# Altium PCB LANA_TNY_01.PcbDoc
Units mil, origin at the board's own origin, x right, y up, seen from the top; angles counter-clockwise.
Board outline 700 x 800 mil, 2 copper layers (Top Layer, Bottom Layer), stack 32.328 mil thick; 32 components, 32 nets, 149 pads, 33 vias.
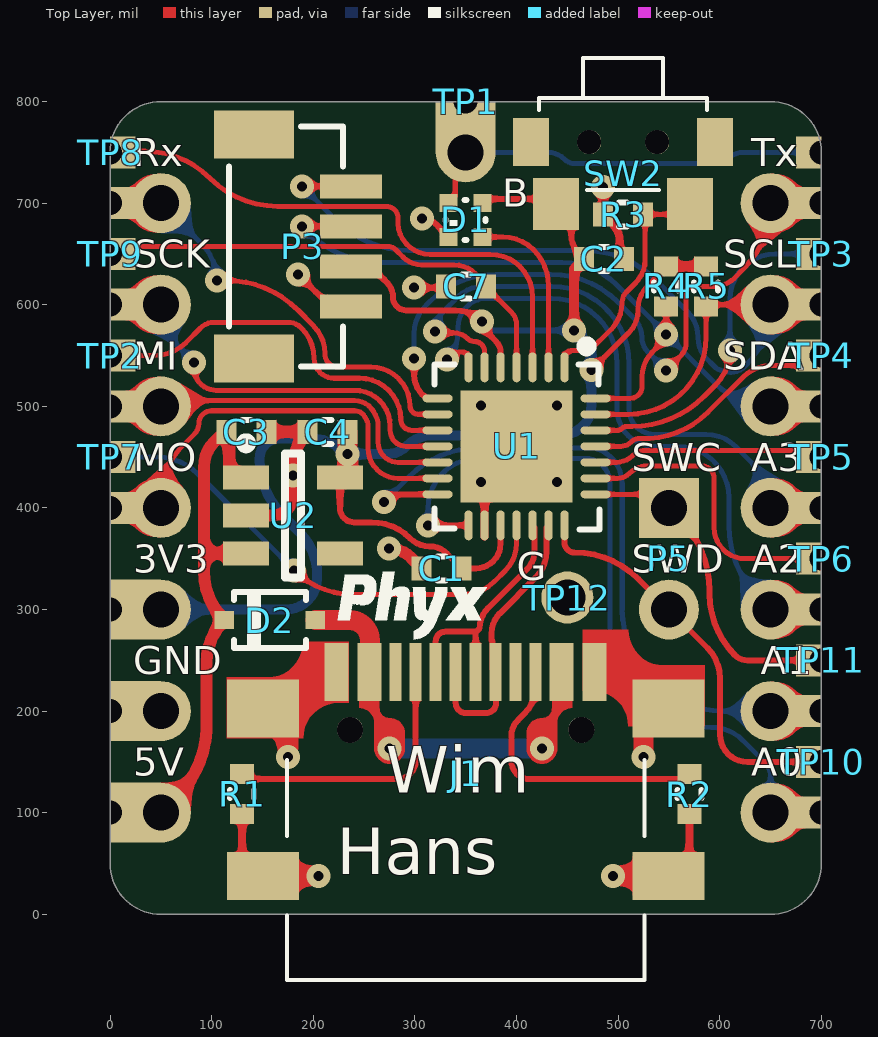
[diagram p0: Top Layer view]
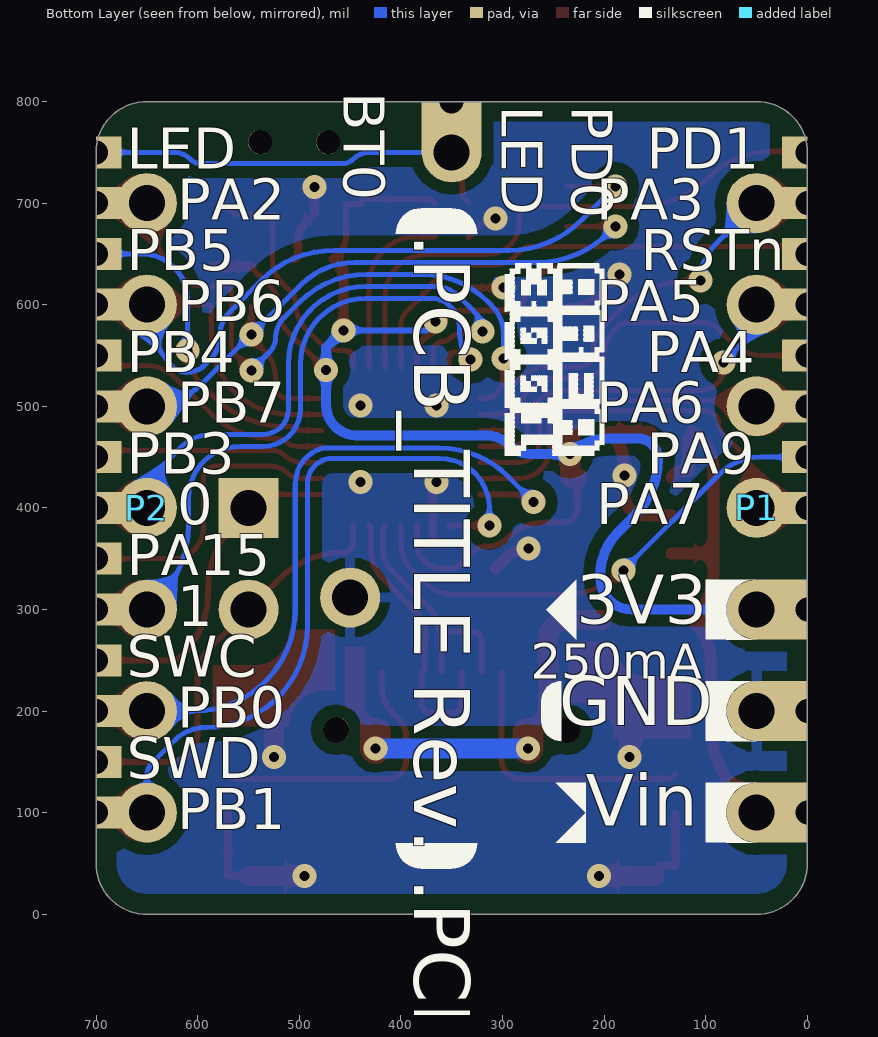
[diagram p1: Bottom Layer view, seen from below]

## Layer stack, top to bottom
Top Solder: solder mask 0.4, Solder Resist, Dk 3.5
Top Layer: signal copper 1.4
Dielectric1: core 29.5276, FR-4, Dk 4.8
Bottom Layer: signal copper 1.4
Bottom Solder: solder mask 0.4, Solder Resist, Dk 3.5

## Board outline
0,50 0,750 cw(c50,750) 50,800 650,800 cw(c650,750) 700,750 700,50 cw(c650,50) 650,0 50,0 cw(c50,50)

## Design rules (kind name [scope] priority, off if disabled: settings)
BoardOutlineClearance [NOT OnLayer('Top Overlay') AND NOT OnLayer('Bottom Overlay') AND NOT IsText] p1: gap=19.68 ignorepadtopadclearanceinfootprint=FALSE except(0: Arc-SplitContinuation Track-SplitContinuation SMDPad-SplitContinuation THPad-SplitContinuation Via-SplitContinuation Fill-SplitContinuation Poly-SplitContinuation Region-SplitContinuation Text-SplitContinuation; 9.84: Track-OutlineEdge SMDPad-OutlineEdge THPad-OutlineEdge)
Clearance [All] p1: gap=5.91 ignorepadtopadclearanceinfootprint=FALSE except(0: Arc-Hole Track-Hole SMDPad-Hole THPad-Hole Via-Hole Fill-Hole Poly-Hole Region-Hole Text-Hole; 5: Arc-Arc Arc-Track Arc-SMDPad Arc-THPad Arc-Via Arc-Region Track-Track Track-SMDPad Track-THPad Track-Via Track-Region SMDPad-SMDPad; 9.84: SMDPad-Poly Poly-Region; 11.81: Arc-Poly Track-Poly THPad-Poly Via-Poly Fill-Poly; 19.68: Poly-Poly)
ComponentClearance ComponentClearance_J2/D6/D10 [InComponent('J2') vs InComponent('D6') OR InComponent('D10')] p1: gap=10 collisioncheckmode=3 verticalgap=0 showdistances=FALSE
ComponentClearance [All] p2: gap=10 collisioncheckmode=3 verticalgap=10 showdistances=FALSE
DiffPairsRouting [All] p1: maxlimit=5.91 minlimit=5.91 mostfreqgap=5.91 toplayer_minwidth=5.91 toplayer_maxwidth=5.91 toplayer_prefwidth=5.91 bottomlayer_minwidth=5.91 bottomlayer_maxwidth=5.91 bottomlayer_prefwidth=5.91 maxuncoupledlength=500
HoleSize [All] p1: absolutevalues=TRUE maxlimit=393.7 minlimit=1 maxpercent=80.000 minpercent=20.000
PolygonConnect PolygonConnect_VIA [IsVia] p1: connectstyle=Direct reliefconductorwidth=10 reliefentries=4 polygonreliefangle="90 Angle" airgapwidth=10
PolygonConnect [All] p2: connectstyle=Relief reliefconductorwidth=10 reliefentries=4 polygonreliefangle="90 Angle" airgapwidth=10
RoutingVias [All] p1: holewidth=11.81 width=27.56 viastyle="Through Hole" minholewidth=11.81 minwidth=7.87 maxholewidth=23.62 maxwidth=47.24
SilkToSolderMaskClearance SilkscreenOverComponentPads [IsPad] p1: minsilkscreentomaskgap=10 clearancetoexposedcopper=TRUE
SolderMaskExpansion [All] p1: expansion=1.97 istentingtop=FALSE
Width [All] p1: maxlimit=196.85 minlimit=5 preferedwidth=9.84
26 further rules are at their usual default settings.

## Classes and differential pairs
net class 90r: USB.D_n USB.D_p
net class POWER: GND VSYS VUSB
differential pair USB.D: +USB.D_p -USB.D_n

## Components (designator, comment, footprint, x,y, rotation, side; value= is the part's Value field where it differs from the comment)
C1 "CAP_CERAMIC" C0402 326.38,340.57 r180 top value="100nF 16V"
C2 "CAP_CERAMIC" C0402 486,645 r0 top value="100nF 16V"
C3 "CAP_CERAMIC" C0402 134,474.88 r0 top value="1uF 10V"
C4 "CAP_CERAMIC" C0402 214,474.88 r180 top value="1uF 10V"
C7 "CAP_CERAMIC" C0402 350.39,618.11 r180 top value="100nF 16V"
D1 "WS2812 based digital RGB LED 1010 package" LED_1010_WS2812B 350,683.38 r0 top value=XL-1010RGBC-WS2812B
D2 "CUS10S30 Schottky Power Rectifier, 1A, 30V" SOD-323_AC 157.13,289.57 r180 top value=CUS10S30,H3F
J1 "USB 2.0 C Reversible Receptacle Horizontal full SMD" XUNPU-TYPEC-304S-ACP16 350,138.19 r0 top value=TYPEC-304S-ACP16
P1 "Header 7" HDR1X7 50,100 r90 bottom
P2 "Header 7" HDR1X7 650,100 r90 bottom
P3 "Header 1.0mm Shrouded 4" WE_665304124022 237.2,598.43 r270 top value=665304124022
P5 "Header 2" HDR1X2 550,400 r270 top
R1 "RESISTOR" R0402 130,118.19 r90 top value=5K1
R2 "RESISTOR" R0402 570,118.19 r90 top value=5K1
R3 "RESISTOR" R0402 505,688.98 r180 top value=5K1
R4 "RESISTOR" R0402 547.24,618.11 r270 top value=5K1
R5 "RESISTOR" R0402 586.61,618.11 r270 top value=5K1
SW2 "TS24CA RA Tactile Switch 12V 50mA" SHOU_HAN_TS24CA 505,760 r0 top value=TS24CA
TP1 "TEST_PAD" TP_0.4mm 350,800 r0 top value="NO BOM"
TP2 "TEST_PAD" TP_0.4mm 0,550 r90 top value="NO BOM"
TP3 "TEST_PAD" TP_0.4mm 700,650 r90 top value="NO BOM"
TP4 "TEST_PAD" TP_0.4mm 700,550 r90 top value="NO BOM"
TP5 "TEST_PAD" TP_0.4mm 700,450 r90 top value="NO BOM"
TP6 "TEST_PAD" TP_0.4mm 700,350 r90 top value="NO BOM"
TP7 "TEST_PAD" TP_0.4mm 0,450 r90 top value="NO BOM"
TP8 "TEST_PAD" TP_0.4mm 0,750 r90 top value="NO BOM"
TP9 "TEST_PAD" TP_0.4mm 0,650 r90 top value="NO BOM"
TP10 "TEST_PAD" TP_0.4mm 700,150 r90 top value="NO BOM"
TP11 "TEST_PAD" TP_0.4mm 700,250 r90 top value="NO BOM"
TP12 "TEST_PAD" TP_1.2mm_0.6mm 450,311.81 r0 top value="NO BOM"
U1 "WCH CH32V203G8U6 QFN28 RISC-V 32-bit MCU, 64KB Flash, 20KB RAM, USB, CAN" QFN_28_4.0x4.0_P0.4 400,460.63 r270 top value=CH32V203G8U6
U2 "3V3 LDO 300mA 150mV" SOT23-5 180,392.76 r0 top value=RT9078-33GJ5

## Footprints (in the part's own frame and the unit in brackets; to place one, negate y for a bottom-side part, rotate by r counter-clockwise, add the part's x,y. Pads: shape width x height; smd on the part's side, far side on the other; paste and mask are expansions set on the pad)
C0402 [mm]
  rect 0.5x0.6 smd: 1(-0.5,0) 2(0.5,0)
  silkscreen extent -0.1,-0.3 0.1,0.3, body extent -0.5,-0.25 0.5,0.25, height 0.5
HDR1X2 [mm] "Connector; Header; 2 Position"
  rect 1.5x1.5 hole 0.9: 1(0,0)
  round 1.5 hole 0.9: 2(2.54,0)
  body extent -1.17,-1.25 3.91,1.25, height 8.2
HDR1X7 [mm] "Connector; Header; 7 Position"
  round 1.5 hole 0.9: 1(0,0) 2(2.54,0) 3(5.08,0) 4(7.62,0) 5(10.16,0) 6(12.7,0) 7(15.24,0)
  body extent -1.27,-1.14 16.51,1.14, height 8.13
LED_1010_WS2812B [mm] "1010 WS2812B based RGB LED"
  rect 0.45x0.45 smd: 1(-0.425,0.425) 2(0.425,0.425) 3(-0.425,-0.425) 4(0.425,-0.425)
  silkscreen extent -0.5,-0.5 0.5,0.5, body extent -0.5,-0.5 0.5,0.5, height 0.8
QFN_28_4.0x4.0_P0.4 [mm]
  oval 0.75x0.2 smd: 1(-1.975,1.2) 2(-1.975,0.8) 3(-1.975,0.4) 4(-1.975,0) 5(-1.975,-0.4) 6(-1.975,-0.8) 7(-1.975,-1.2) 15(1.975,-1.2) 16(1.975,-0.8) 17(1.975,-0.4) 18(1.975,0) 19(1.975,0.4) 20(1.975,0.8) 21(1.975,1.2)
  oval 0.2x0.75 smd: 8(-1.2,-1.975) 9(-0.8,-1.975) 10(-0.4,-1.975) 11(0,-1.975) 12(0.4,-1.975) 13(0.8,-1.975) 14(1.2,-1.975) 22(1.2,1.975) 23(0.8,1.975) 24(0.4,1.975) 25(0,1.975) 26(-0.4,1.975) 27(-0.8,1.975) 28(-1.2,1.975)
  rect 2.8x2.8 smd: 29(0,0)
  silkscreen extent -2.62,-2.05 2.07,2.07, body extent -2.07,-2.07 2.07,2.07, height 0.8
R0402 [mm]
  rect 0.5x0.6 smd: 1(-0.5,0) 2(0.5,0)
  silkscreen extent -0.1,-0.3 0.1,0.3, body extent -0.5,-0.25 0.5,0.25, height 0.35
SHOU_HAN_TS24CA [mm] "TS24CA tactile switch"
  rect 0.9x1.2 smd: 0(-2.3,0) 0(2.3,0)
  round 0.6 hole 0.6 unplated: 0(-0.85,0) 0(0.85,0)
  rect 1.15x1.3 smd: 1(-1.675,-1.55) 2(1.675,-1.55)
  silkscreen extent -2.1,-1.2 2.1,2.1, body extent -2.1,-1.2 2.1,2.1, height 1.8
SOD-323_AC [mm] "SOD-323"
  rect 0.49x0.45 smd: A(-1.14,0) C(1.14,0)
  silkscreen extent -0.9,-0.7 0.9,0.7, body extent -1.3,-0.68 1.3,0.68, height 1.1
SOT23-5 [mm] "SOT23, 5-Leads, Body 3,1x3,2mm (max), Pitch 0,95mm, IPC Medium Density"
  rect 1.15x0.6 smd: 1(-1.175,0.95) 2(-1.175,0) 3(-1.175,-0.95) 4(1.175,-0.95) 5(1.175,0.95)
  silkscreen extent -1.3,-1.55 0.2,1.92, body extent -1.4,-1.45 1.4,1.45, height 1.45
TP_0.4mm [mm] "0.4mm pad"
  round 0.4 smd mask+0.05: 1(0,0)
TP_1.2mm_0.6mm [mm] "1.2mm pad, 0.6mm hole"
  round 1.3 / inner round 1.5 / far side round 1.5 hole 0.9 mask+0.05: 1(0,0)
WE_665304124022 [mm]
  rect 0.6x1.55 smd: 1(0,0) 2(-1,0) 3(-2,0) 4(-3,0)
  rect 1.2x2 smd: Z1(-4.3,-2.425) Z2(1.3,-2.425)
  silkscreen extent -4.5,-3.05 1.5,-0.2, body extent -4.5,-3.1 1.5,0.5, height 4.35
XUNPU-TYPEC-304S-ACP16 [mm] "USB C Connector SMD"
  round 0.65 hole 0.65 unplated: 0(-2.89,1.102) 0(2.89,1.102)
  rect 0.3x1.45 smd: A1(-3.375,2.547) A4(-2.55,2.548) A5(-1.25,2.548) A6(-0.25,2.547) A7(0.25,2.547) A8(1.25,2.548) A9(2.55,2.547) A12(3.375,2.548) B1(3.075,2.547) B4(2.25,2.548) B5(1.75,2.548) B6(0.75,2.547) B7(-0.75,2.547) B8(-1.75,2.548) B9(-2.25,2.547) B12(-3.075,2.548)
  rect 1.8x1.45 smd: MH1(-5.07,1.632) MH4(5.07,1.632)
  rect 1.8x1.2 smd: MH2(-5.07,-2.548) MH3(5.07,-2.548)
  silkscreen extent -4.47,-5.15 4.47,0.35, body extent -4.5,-5.15 4.44,2.75, height 3.26

## Part data
C1 C2 C7: library part "CAP # 100nF 16V 0402", "Capacitor Ceramic", Supplier Part Number 1=1758896, Supplier 1=Farnell, Supplier 3=Generic, Supplier Part Number 3="100nF 16V 0402 X7R"
C3 C4: library part "CAP # 1uF 10V 0402", "Capacitor Ceramic", Supplier Part Number 1=C380293, Supplier 1=LCSC, Supplier 3=Generic, Supplier Part Number 3="1uF 10V 0402 X5R"
D1: library part "LED # RGB XL-1010RGBC-WS2812B", "=Description", Supplier Part Number 1=C5349953, Supplier 1=LCSC
D2: library part "Schottky # CUS10S30", "=Description", Supplier Part Number 1=C146335, Supplier 1=LCSC
J1: library part "USB # C 2.0 RCPT TYPEC-304S-ACP16", Supplier Part Number 1=C720630, Supplier 1=LCSC
P1 P2: library part "Pin Header 2.54mm 7way"
P3: library part "HDR # SHR 1.0mm 4way - 665304124022", Supplier Part Number 1=665304124022, Supplier 1=Wurth, Supplier 2=Mouser, Supplier Part Number 2=710-665304124022
P5: library part "Pin Header 2.54mm 2way", Supplier Part Number 1=C492401, Supplier 1=LCSC, Supplier 2=LCSC, Supplier Part Number 2=C541856
R1 R2 R3 R4 R5: library part "RES # 5K1 0402", Supplier Part Number 1=C274895, Supplier 1=LCSC, Supplier 3=Generic, Supplier Part Number 3="5K1 1% 0402"
SW2: library part "SW # TACT RA TS24CA", Supplier Part Number 1=C393942, Supplier 1=LCSC
TP1 TP2 TP3 TP4 TP5 TP6 TP7 TP8 TP9 TP10 TP11: library part "TP # 0.4mm", Supplier Part Number 1="FOOTPRINT ONLY", Supplier 1=XXX
TP12: library part "TP 1.2mm", Supplier Part Number 1="FOOTPRINT ONLY", Supplier 1=XXX
U1: library part "RISCV # CH32V203G8U6", Supplier Part Number 1=C5187530, Supplier 1=LCSC
U2: library part "LDO # 3V3 300mA RT9078-33GJ5", "=Designator", Supplier Part Number 1=C110427, Supplier 1=LCSC

## Free pads (board coordinates)
  rect 50x59.06 hole 23.62 copper offset 25,0: 0(0,100) 0(0,200) 0(0,300)
  rect 25x31.5 hole 23.62 copper offset 12.5,0: 0(0,400) 0(0,500) 0(0,600) 0(0,700)
  rect 25x31.5 hole 23.62 copper offset 12.5,0 mask+1.97: 0(0,450) 0(0,550) 0(0,650) 0(0,750)
  rect 59.06x50 hole 23.62 copper offset 0,-25: 0(350,800)
  rect 25x31.5 hole 23.62 copper offset -12.5,0: 0(700,100) 0(700,200) 0(700,300) 0(700,400) 0(700,500) 0(700,600) 0(700,700)
  rect 25x31.5 hole 23.62 copper offset -12.5,0 mask+1.97: 0(700,150) 0(700,250) 0(700,350) 0(700,450) 0(700,550) 0(700,650) 0(700,750)
  round 59.06 hole 35.43: 1(350,750)

## Via types
v1: diameter 23.62, hole 9.84, Top Layer to Bottom Layer, tented both sides, 33 vias

## Nets (pads, with @x,y where several pads share a name; then routed paths per layer and width w, separated by ;. In a path a pad name is that pad's centre, name@x,y a point inside that pad or via, vN(x,y) a via of type N, cw(c..) or ccw(c..) an arc to the next point about the centre after c; other vN are vias at no path point)
+3V3: C1.1 C2.1 C4.1 D1.2 P1.3 P3.2 pad.0@0,300 R4.1 R5.1 SW2.1 U1.5 U1.17 U2.5 | length 1742
  Top Layer w5: v1(473.71,535.69) 510.61,572.58 ccw(c488.71,594.49) 519.68,594.49 519.68,596.49 cw(c550.06,596.49) 528.58,617.97 547.24,636.64 R4.1
  Top Layer w5.91: U2.5 226.26,399.72 ccw(c240.16,399.72) 240.16,385.83 257.26,385.83 cw(c257.26,332.06) 295.28,370.08 ccw(c314.29,389.09) 314.29,362.2 cw(c314.29,337.72) 331.6,355.03 C1.1 360.02,340.57 ccw(c360.02,364.8) 384.25,364.8 U1.17 ; P3.2 cw(c237.2,591.24) 270.12,624.16 272.42,621.86 cw(c257.9,607.34) 278.44,607.34 ccw(c291.29,607.34) 291.29,594.49 339.79,594.49 cw(c339.79,557.42) v1(366,583.63) ccw(c380.28,583.63) 370.17,573.54 379.96,563.76 cw(c369.58,553.39) 384.25,553.39 U1.5 ; D1.2 370.67,704.05 439.06,704.05 SW2.1 454,698.98 454,668 ccw(c479.8,668) 461.56,649.76 C2.1 C2.1@467,644.31
  Top Layer w9.84: v1(456.69,574.8) 456.69,635.38 C2.1 ; R4.1 R5.1
  Top Layer w19.68: U2.5 233.82,430.16 v1(233.82,452.99) C4.1@233.82,474.88
  Bottom Layer w5.91: v1(366,583.63) 374.83,574.8 v1(456.69,574.8)
  Bottom Layer w9.84: P1.3 173.25,300 ccw(c173.25,330.21) 203.46,330.21 203.46,340.61 ccw(c143.33,333.47) 186.15,376.29 170.17,392.26 cw(c226.1,448.2) 147,448.2 cw(c167.31,448.2) 167.31,468.5 196.37,468.5 cw(c196.37,415.55) v1(233.82,452.99) ; v1(233.82,452.99) 272.9,452.99 ccw(c272.9,479.06) 291.34,460.63 cw(c317.58,434.39) 317.58,471.5 443.94,471.5 ccw(c443.94,501.27) 473.71,501.27 v1(473.71,535.69) 473.71,545.52 473.71,557.78 v1(456.69,574.8)
BOOT0: R3.1 SW2.2 U1.1 | length 243.1
  Top Layer w5: U1.1 447.24,547.57 cw(c454.65,547.57) 454.65,554.97 459.41,554.97 ccw(c459.41,586.08) 464.61,555.41 ccw(c459.41,586.08) 481.41,564.08 492.8,575.48 ccw(c465.92,602.36) 503.94,602.36 cw(c518.43,602.36) 508.17,612.6 517.5,621.93 ccw(c495.47,643.97) 519.93,624.66 ccw(c495.47,643.97) 526.63,643.97 526.63,687.03 ccw(c524.68,687.03) R3.1 560.94,688.98 ccw(c560.94,698.98) SW2.2
GND: C1.2 C2.2 C3.2 C4.2 C7.2 D1.3 J1.A1 J1.A12 J1.B1 J1.B12 J1.MH1 J1.MH2 J1.MH3 J1.MH4 P1.2 P3.1 pad.0@0,200 R1.1 R2.1 R3.2 TP12.1 U1.16 U1.29 U2.2 | length 865
  Top Layer w5.91: v1(185.04,629.92) 201.92,613.04 ccw(c237.2,648.33) P3.1 ; v1(299.09,616.71) 329.31,616.71 ccw(c329.31,618.11) C7.2 ; v1(307.09,685.04) cw(c307.09,666.24) 320.38,679.53 D1.3
  Top Layer w7.87: R1.1 130,48.19 J1.MH2@145,48.19 ; v1(365,425.63) cw(c356.54,417.17) 368.5,417.17 U1.16@368.5,372.05 ; v1(485.32,715.98) R3.2 494.6,679.69 cw(c478.14,663.23) 501.42,663.23 501.42,649.26 ccw(c505.68,649.26) C2.2 ; J1.MH3@550,38.19 570,38.19 R2.1
  Top Layer w11.81: U2.2 160.31,392.76 ccw(c160.31,412.44) 180,412.44 v1(180,432.13) 180,440.32 cw(c228.87,440.32) C4.2 C3.2 ; v1(274.62,360.02) cw(c274.62,329.58) 296.15,351.11 C1.2
  Top Layer w19.68: J1.MH2 J1.MH2@174.7,37.89 ; J1.MH1 175,202.46 v1(175,154.85) ; J1.MH2@175,38.19 J1.MH2@174.7,37.89 ; v1(205,37.89) J1.MH2@174.7,37.89 ; v1(495,37.89) J1.MH3 ; v1(525,154.85) 525,202.46 J1.MH4
  other v1: 440,425.63 365,500.63 440,500.63
LED.DOUT: D1.1 pad.0@350,800 pad.0@700,750 pad.1 TP1.1 | length 400.6
  Top Layer w5: D1.1 339.66,706.5 339.66,734.1 350,744.44 pad.1
  Bottom Layer w5: pad.1 430.55,750 cw(c430.55,726.1) 447.45,743 ccw(c457.17,752.72) 457.17,738.97 597.28,738.97 ccw(c597.28,752.72) 607,743 cw(c623.9,726.1) 623.9,750 pad.0@687.87,750
NetJ1_A5: J1.A5 R1.2 | length 270.2
  Top Layer w5.91: R1.2 134.68,133.19 282.62,133.19 ccw(c282.62,151.35) 300.79,151.35 J1.A5
NetJ1_B5: J1.B5 R2.2 | length 282.1
  Top Layer w5.91: J1.B5 418.9,224.32 cw(c380.9,224.32) 407.77,197.45 401.22,190.91 ccw(c416.24,175.89) 395,175.89 395,150.61 ccw(c412.42,150.61) 412.42,133.19 565.32,133.19 R2.2
PA0: P2.4 pad.0@700,400 U1.6 | length 568.5
  Top Layer w5: v1(319.79,573.55) 321.09,572.24 338.21,572.24 cw(c338.21,552.5) 352.17,566.46 ccw(c359,573.29) 359,563.63 cw(c359,554.13) 368.5,554.13 U1.6
  Bottom Layer w5: v1(319.79,573.55) cw(c347.61,573.55) 327.93,593.22 342.61,607.89 cw(c367.28,583.23) 367.28,618.11 434.42,618.11 cw(c434.42,541.73) 510.8,541.73 510.8,497.07 ccw(c535.43,497.07) 535.43,472.44 586.47,472.44 cw(c586.47,431.18) 615.62,460.38 ; 615.64,460.36 631.62,444.38 cw(c587.23,400) P2.4
PA1: P2.3 pad.0@700,300 U1.7 | length 607.6
  Top Layer w5: v1(331.37,546.13) 333.51,548.27 cw(c346.45,535.34) 346.45,553.63 cw(c346.45,547.32) 352.76,547.32 U1.7
  Bottom Layer w5: v1@331.39,546.15 ccw(c304.46,573.04) 342.52,573.04 342.52,578.08 cw(c370.74,578.08) 346.54,592.59 cw(c370.74,578.08) 348.12,594.96 353.86,600.7 cw(c370.74,578.08) 370.74,606.3 434.42,606.3 cw(c434.42,541.73) 498.99,541.73 498.99,497.07 ccw(c535.43,497.07) 535.43,460.63 558.37,460.63 cw(c558.37,410) 609,410 609,382.42 ccw(c709,382.42) 638.29,311.71 P2.3
PA2: P2.7 pad.0@700,700 U1.8 | length 619.9
  Top Layer w5: v1(547.24,535.43) 561.69,549.88 ccw(c549.06,562.52) 566.93,562.52 566.93,611.14 cw(c573.9,611.14) 573.9,618.11 594.49,618.11 ccw(c594.49,646.62) 614.65,626.46 623,634.81 ccw(c557.8,700) P2.7
  Top Layer w5.91: v1(299.21,547.24) 299.21,530.82 ccw(c326.1,530.82) 307.09,511.81 ccw(c316.59,521.32) 316.59,507.87 U1.8
  Bottom Layer w5: v1(299.21,547.24) 299.21,571.47 cw(c338.44,571.47) 310.7,599.21 314.37,602.88 cw(c379.66,537.59) 379.66,629.92 433.47,629.92 cw(c433.47,535.83) 500,602.36 515.39,586.97 cw(c496.28,567.86) 523.31,567.86 ccw(c543.8,567.86) 523.59,564.45 ccw(c543.8,567.86) 529.31,553.37 ; 529.31,553.37 v1(547.24,535.43)
PA3: P1.7 pad.0@0,700 U1.9 | length 381.5
  Top Layer w5: v1(105,624) 114.11,624 cw(c114.11,524) 184.82,594.71 199.74,579.79 cw(c171.72,551.78) 211.34,551.78 211.34,551.6 ccw(c224.27,551.6) 224.27,538.67 256.6,538.67 cw(c256.6,500) 295.28,500 ccw(c303.15,500) 303.15,492.13 U1.9
  Bottom Layer w5: P1.7 90.15,659.85 cw(c54.3,624) v1(105,624)
PA4: pad.0@0,550 TP2.1 U1.10 | length 380.7
  Top Layer w5: pad.0@15,550 43.44,550 ccw(c43.44,594.36) 74.79,562.98 88.92,577.11 cw(c102.36,563.67) 102.36,582.68 174.49,582.68 cw(c174.49,562.85) 185.61,579.27 cw(c174.49,562.85) 188.52,576.87 ; 188.54,576.85 cw(c158.89,547.24) 200.79,547.24 ccw(c220.38,547.24) 220.38,527.65 245.53,527.65 cw(c245.53,487.12) 286.06,487.12 ccw(c296.8,487.12) 296.8,476.38 U1.10
PA5: P1.6 pad.0@0,600 U1.11 | length 359
  Top Layer w5: v1(82.68,543.31) 82.68,537.29 ccw(c104.22,537.29) 98.98,516.39 ccw(c104.22,537.29) 104.22,515.75 240.61,515.75 cw(c240.61,480.77) 275.59,480.77 275.59,476.38 ccw(c291.34,476.38) 291.34,460.63 U1.11
  Bottom Layer w5: P1.6 ccw(c107.98,600) 66.98,559 v1(82.68,543.31)
PA6: P1.5 pad.0@0,500 U1.12 | length 315.5
  Top Layer w5: P1.5 cw(c63.54,486.46) 63.54,505.61 240.61,505.61 cw(c240.61,484.25) 256.86,498.11 cw(c240.61,484.25) 259.01,495.1 cw(c238.49,480.31) 263.78,480.31 263.78,464.57 ccw(c283.46,464.57) 283.46,444.88 U1.12
PA7: P1.4 pad.0@0,400 U1.13 | length 384.4
  Top Layer w5: P1.4 50,410.25 cw(c121.24,410.25) 70.87,460.63 83.17,472.94 ccw(c73.25,482.86) 87.29,482.86 cw(c100.03,482.86) 100.03,495.61 240.61,495.61 cw(c240.61,484.25) 250.36,490.07 ccw(c259.01,495.1) 250.43,489.96 ccw(c259.01,495.1) 250.93,489.2 cw(c238.49,480.31) 253.78,480.31 253.78,458.82 ccw(c283.46,458.82) 283.46,429.13 303.3,429.13 U1.13
PA9: pad.0@0,450 TP7.1 U1.18 | length 479.3
  Top Layer w5: v1(181.1,338.58) ccw(c238.13,395.61) 238.13,314.96 348.03,314.96 ccw(c348.03,357.28) 377.94,327.35 389.05,338.45 ccw(c362.6,364.89) 400,364.89 U1.18
  Bottom Layer w5: pad.0@15,450 46.04,450 cw(c46.04,392.93) 86.4,433.28 v1(181.1,338.58)
PA15: pad.0@700,350 TP6.1 U1.23 | length 283.4
  Top Layer w5: U1.23 499.46,429.13 ccw(c499.46,445.56) 511.08,433.95 cw(c528.5,416.52) 522.94,440.53 cw(c528.5,416.52) 528.5,441.16 582.46,441.16 cw(c582.46,429.13) 594.49,429.13 594.49,380.51 ccw(c625,380.51) 625,350 pad.0@685,350
PB0: P2.2 pad.0@700,200 U1.14 | length 654.9
  Top Layer w5.91: v1(269.35,405.83) cw(c287.59,387.59) 287.59,413.39 U1.14
  Bottom Layer w5: v1(269.35,405.83) 294.27,430.75 cw(c362.2,362.81) 362.2,458.89 476.34,458.89 cw(c468.22,424.04) 504,424.04 504,300 ccw(c604,300) 604,200 P2.2
PB1: P2.1 pad.0@700,100 U1.15 | length 690.7
  Top Layer w5.91: v1@313.24,382.87 U1.15
  Bottom Layer w5: v1(313,382.63) 313,399.61 cw(c362.2,399.61) 362.2,448.82 467.22,448.82 cw(c467.22,424.04) 492,424.04 492,284 ccw(c592,284) 592,184 cw(c592,140.54) 603.81,182.36 cw(c592,140.54) 622.73,171.27 644.34,149.66 cw(c630.69,136) 650,136 P2.1
PB3: pad.0@700,450 TP5.1 U1.24 | length 209.9
  Top Layer w5: U1.24 498.1,444.88 ccw(c498.1,467.97) 514.42,451.64 cw(c526.61,439.45) 524.47,456.56 cw(c526.61,439.45) 526.61,456.69 684.21,456.69 pad.0@684.45,456.46
PB4: pad.0@700,550 TP4.1 U1.25 | length 238.6
  Top Layer w5: U1.25 502.85,460.63 ccw(c502.85,474.07) 512.36,464.57 cw(c521.86,455.06) 521.86,468.5 ccw(c526.29,556.08) 588.3,494.08 623.06,528.84 cw(c650,501.91) 650,540 680,540 pad.0@680,550
PB5: pad.0@700,650 TP3.1 U1.26 | length 325.4
  Top Layer w5: U1.26 499.12,476.38 ccw(c499.12,483.1) 503.86,478.34 cw(c508.63,473.57) 508.63,480.31 513.7,480.31 ccw(c513.7,580.31) 584.41,509.6 596.32,521.51 ccw(c562.71,555.12) v1(610.24,555.12)
  Bottom Layer w5: v1(610.24,555.12) 610,555.35 610,605 cw(c655,605) 655,650 685,650 pad.0@685,645
PB6: P2.6 P3.4 pad.0@700,600 R5.2 U1.27 | length 878.8
  Top Layer w5: v1(188.98,716.54) P3.4 ; U1.27 510.29,492.13 ccw(c510.29,568.45) 586.61,568.45 R5.2 cw(c590.42,594.62) 590.42,600 P2.6
  Bottom Layer w5: v1(188.98,716.54) 222.39,683.13 ccw(c293.8,754.54) 293.8,653.54 466.04,653.54 cw(c466.04,552.54) 537.46,623.96 568.23,593.19 cw(c542.84,567.81) 578.74,567.81 ccw(c610.6,567.81) 584.7,549.25 595.78,538.17 ccw(c610.84,559.93) 610.84,533.47 ccw(c610.84,553.28) 624.85,539.27 ccw(c564.12,600) P2.6
PB7: P2.5 P3.3 pad.0@700,500 R4.2 U1.28 | length 711.4
  Top Layer w5: v1(188.98,677.17) P3.3 ; U1.28 511.81,507.87 ccw(c511.81,519.68) 523.62,519.68 523.62,529.2 cw(c557.68,529.2) 533.6,553.28 547.24,566.93 v1(547.24,570.87) R4.2
  Bottom Layer w5: v1(188.98,677.17) 194.83,671.31 ccw(c266.25,742.73) 266.25,641.73 444.88,641.73 cw(c444.88,565.69) 498.65,619.46 v1(547.24,570.87) 595.56,522.55 ccw(c650,576.99) P2.5
PD0: D1.4 U1.2 | length 173
  Top Layer w5: D1.4 386.51,666.65 cw(c386.51,623.9) 416.73,654.14 cw(c381.12,618.5) 431.5,618.5 U1.2
PD1: pad.0@0,750 TP8.1 U1.3 | length 537.8
  Top Layer w5: pad.0@14.64,751.03 34.17,751.03 cw(c34.17,660.15) 98.43,724.41 ccw(c164.96,790.94) 164.96,696.85 271.65,696.85 cw(c271.65,685.04) 283.46,685.04 ccw(c314.78,681.16) 314.78,649.61 374.02,649.61 cw(c374.02,607.87) 415.75,607.87 U1.3
RSTn: C7.1 pad.0@0,650 TP9.1 U1.4 | length 458.5
  Top Layer w5: pad.0@17.52,657.12 17.88,657.48 273.11,657.48 cw(c273.11,646.4) 280.94,654.24 288.47,646.7 ccw(c306.65,664.89) 306.65,639.17 338.47,639.17 cw(c338.47,608.95) 359.84,630.32 C7.1@368.69,621.47 ; C7.1@368.7,621.45 cw(c365.33,618.11) C7.1 370.08,617.56 394.93,592.7 cw(c382.7,580.47) 400,580.47 U1.4
SWCLK: P5.1 pad.0@700,250 TP11.1 U1.22 | length 309.8
  Top Layer w5: U1.22 550,413.39 P5.1
  Top Layer w5.91: P5.1@560.71,389.29 cw(c490,318.58) 590,318.58 590,315.36 ccw(c675.36,315.36) 615,255 ccw(c627.07,267.07) 627.07,250 pad.0@689,250
SWDIO: P5.2 pad.0@700,150 TP10.1 U1.21 | length 391
  Top Layer w5.91: U1.21 447.24,365.64 ccw(c456.69,365.64) 456.69,356.19 cw(c456.69,266.57) 520.06,329.94 P5.2 587.93,262.07 cw(c558.12,232.26) 600.28,232.26 600.28,176.8 ccw(c627.07,176.8) 627.07,150 pad.0@689,150
USB.D_n: J1.A7 J1.B7 U1.19 | length 242.3
  Top Layer w5.91: J1.B7 320.47,268.66 cw(c330,268.66) 330,278.19 360.32,278.19 ; J1.A7 359.84,277.04 cw(c361.47,277.04) 360.32,278.19 ; U1.19 417.72,380.91 417.72,357.28 cw(c393.16,357.28) 410.53,339.92 371.93,301.33 ccw(c391.61,281.65) 363.78,281.65 360.32,278.19
USB.D_p: J1.A6 J1.B6 U1.20 | length 278.9
  Top Layer w5.91: J1.A6 340.16,208.03 ccw(c350,208.03) 350,198.19 370,198.19 ccw(c370,208.19) 380,208.19 380,238.48 J1.B6 376.57,241.44 376.57,268.73 375.59,269.71 375.59,277.36 cw(c401.97,277.36) 383.31,296 418.93,331.62 ccw(c393.33,357.22) 429.53,357.22 429.53,380.91 U1.20
VSYS: C3.1 D2.C P1.1 pad.0@0,100 U2.1 U2.3 | length 504.9
  Top Layer w11.81: P1.1 65.71,115.71 ccw(c-5,186.42) 94.84,180.81 94.84,247.56 cw(c154.25,247.56) D2.C cw(c160.69,338.01) 92.18,338.01 92.18,355.35 ; C3.1@113.33,475.87 102.75,465.29 ccw(c128.29,439.75) 92.18,439.75 92.18,355.35 ; C3.1@114.32,471.67 117.01,468.98 117.01,436.06 127.83,436.06 U2.1 ; U2.3 92.18,355.35
VUSB: D2.A J1.A4 J1.A9 J1.B4 J1.B9 | length 252.6
  Top Layer w19.68: D2.A 235.89,289.57 cw(c235.89,269.88) 255.58,269.88 J1.B9@255.58,232.1
  Bottom Layer w19.68: v1(275,163.19) v1(425,163.19)
pads on no net: J1.0 J1.A8 J1.B8 P3.Z1 P3.Z2 SW2.0 U2.4

## Polygon pours and split planes (outlines as drawn)
GND on Bottom Layer "GND_L02_P000" (solid, remove dead copper, pour order 0): 700,800 700,0 0,0 0,800

## Other copper
Top Layer:
  region net PA3: 50,700 50,729 46.73,729 ccw(c46.73,698.27) 25,720 cw(c12.93,732.07) 12.93,715 8,715 8,700
  region net PA3: 50,700 50,671 46.73,671 cw(c46.73,701.73) 25,680 ccw(c12.93,667.93) 12.93,685 8,685 8,700
  region net PA5: 50,600 50,629 46.73,629 ccw(c46.73,598.27) 25,620 cw(c12.93,632.07) 12.93,615 8,615 8,600
  region net PA5: 50,600 50,571 46.73,571 cw(c46.73,601.73) 25,580 ccw(c12.93,567.93) 12.93,585 8,585 8,600
  region net PA6: 50,500 50,529 46.73,529 ccw(c46.73,498.27) 25,520 cw(c12.93,532.07) 12.93,515 8,515 8,500
  region net PA6: 50,500 50,471 46.73,471 cw(c46.73,501.73) 25,480 ccw(c12.93,467.93) 12.93,485 8,485 8,500
  region net PA7: 50,400 50,429 46.73,429 ccw(c46.73,398.27) 25,420 cw(c12.93,432.07) 12.93,415 8,415 8,400
  region net PA7: 50,400 50,371 46.73,371 cw(c46.73,401.73) 25,380 ccw(c12.93,367.93) 12.93,385 8,385 8,400
  region net PB1: 650,100 650,129 653.27,129 cw(c653.27,98.27) 675,120 ccw(c687.07,132.07) 687.07,115 692,115 692,100
  region net PB1: 650,100 650,71 653.27,71 ccw(c653.27,101.73) 675,80 cw(c687.07,67.93) 687.07,85 692,85 692,100
  region net PB0: 650,200 650,229 653.27,229 cw(c653.27,198.27) 675,220 ccw(c687.07,232.07) 687.07,215 692,215 692,200
  region net PB0: 650,200 650,171 653.27,171 ccw(c653.27,201.73) 675,180 cw(c687.07,167.93) 687.07,185 692,185 692,200
  region net PA1: 650,300 650,329 653.27,329 cw(c653.27,298.27) 675,320 ccw(c687.07,332.07) 687.07,315 692,315 692,300
  region net PA1: 650,300 650,271 653.27,271 ccw(c653.27,301.73) 675,280 cw(c687.07,267.93) 687.07,285 692,285 692,300
  region net PA0: 650,400 650,429 653.27,429 cw(c653.27,398.27) 675,420 ccw(c687.07,432.07) 687.07,415 692,415 692,400
  region net PA0: 650,400 650,371 653.27,371 ccw(c653.27,401.73) 675,380 cw(c687.07,367.93) 687.07,385 692,385 692,400
  region net PB7: 650,500 650,529 653.27,529 cw(c653.27,498.27) 675,520 ccw(c687.07,532.07) 687.07,515 692,515 692,500
  region net PB7: 650,500 650,471 653.27,471 ccw(c653.27,501.73) 675,480 cw(c687.07,467.93) 687.07,485 692,485 692,500
  region net PB6: 650,600 650,629 653.27,629 cw(c653.27,598.27) 675,620 ccw(c687.07,632.07) 687.07,615 692,615 692,600
  region net PB6: 650,600 650,571 653.27,571 ccw(c653.27,601.73) 675,580 cw(c687.07,567.93) 687.07,585 692,585 692,600
  region net PA2: 650,700 650,671 653.27,671 ccw(c653.27,701.73) 675,680 cw(c687.07,667.93) 687.07,685 692,685 692,700
  region net PA2: 650,700 650,729 653.27,729 cw(c653.27,698.27) 675,720 ccw(c687.07,732.07) 687.07,715 692,715 692,700
  region net VUSB: 455,263.19 455,203.19 ccw(c455,188.19) 440,188.19 440,163.19 cw(c425,163.19) 425,148.19 cw(c425,163.19) 410,163.19 410,178.19 cw(c425,178.19) 425,193.19 ccw(c425,203.19) 435,203.19 435,263.19
  region net VUSB: 245,263.19 245,203.19 cw(c245,188.19) 260,188.19 260,163.19 ccw(c275,163.19) 275,148.19 ccw(c275,163.19) 290,163.19 290,178.19 ccw(c275,178.19) 275,193.19 cw(c275,203.19) 265,203.19 265,263.19
  region net GND: 235,268.19 235,208.19 225,208.19 ccw(c225,173.19) 190,173.19 115,173.19 115,233.19 155,233.19 ccw(c155,268.19) 190,268.19
  region net GND: 465,280 465,220 475,220 cw(c475,185) 510,185 585,185 585,245 545,245 cw(c545,280) 510,280

## Silkscreen, mask and mechanical layers (free items; w line width, h text height)
Top Overlay:
  drawing of 4 lines, arcs and shapes, not listed
  text "Rx" at 22.91,736.22 h27.56
  text "Tx" at 631.17,736.22 h27.56
  text "B" at 385.82,696.22 h27.56
  text "SCK" at 22.91,636.22 h27.56
  text "SCL" at 603.62,636.22 h27.56
  text "MI" at 22.91,536.22 h27.56
  text "SDA" at 603.62,536.22 h27.56
  text "MO" at 22.91,436.22 h27.56
  text "SWC" at 513.27,436.22 h27.56
  text "A3" at 631.17,436.22 h27.56
  text "3V3" at 22.91,336.22 h27.56
  text "SWD" at 513.27,336.22 h27.56
  text "A2" at 631.17,336.22 h27.56
  text "G" at 400.27,328.74 h27.56
  text "GND" at 22.91,236.22 h27.56
  text "A1" at 640.35,236.22 h27.56
  text "5V" at 22.91,136.22 h27.56
  text "A0" at 631.17,136.22 h27.56
  text "Wim" at 271.05,104.32 h78.74
  text "Hans" at 222.87,24.32 h78.74
Bottom Overlay:
  drawing of 17 lines, arcs and shapes, not listed
  text "BT0" at 469.53,808.98 h68.9 r90
  text "PD0 / LED" at 314.22,796.06 h68.9 r90
  text "PD1" at 157.95,720.47 h68.9
  text "LED" at 670,720.47 h68.9
  text "PA3" at 207.95,670.47 h68.9
  text "PA2" at 620,670.47 h68.9
  text ".PCB_TITLE Rev. .PCB_REV" at 404.97,670 h94.49 r90
  text "RSTn" at 164.21,620.47 h68.9
  text "PB5" at 670,620.47 h68.9
  text "PA5" at 207.95,570.47 h68.9
  text "PB6" at 620,570.47 h68.9
  text "PA4" at 157.95,520.47 h68.9
  text "PB4" at 670,520.47 h68.9
  text "PA6" at 207.95,470.47 h68.9
  text "PB7" at 620,470.47 h68.9
  text "PA9" at 157.95,420.47 h68.9
  text "PB3" at 670,420.47 h68.9
  text "PA7" at 207.95,370.47 h68.9
  text "0" at 620,370.47 h68.9
  text "PA15" at 670,320.47 h68.9
  text "3V3" at 227.64,270.47 h82.68
  text "1" at 620,270.47 h68.9
  text "250mA" at 272.04,220.47 h59.06
  text "SWC" at 670,220.47 h68.9
  text "GND" at 244.06,170.47 h82.68
  text "PB0" at 620,170.47 h68.9
  text "SWD" at 670,120.47 h68.9
  text "Vin" at 217.95,70.47 h86.61
  text "PB1" at 620,70.47 h68.9
Top Solder:
  lines w15.75: 0,440.16 ccw(c0,450) 0,459.84 ; 0,540.16 ccw(c0,550) 0,559.84 ; 0,640.16 ccw(c0,650) 0,659.84 ; 0,740.16 ccw(c0,750) 0,759.84 ; 700,140.16 cw(c700,150) 700,159.84 ; 700,240.16 cw(c700,250) 700,259.84 ; 700,340.16 cw(c700,350) 700,359.84 ; 700,440.16 cw(c700,450) 700,459.84 ; 700,540.16 cw(c700,550) 700,559.84 ; 700,640.16 cw(c700,650) 700,659.84 ; 700,740.16 cw(c700,750) 700,759.84
Outline:
  the board outline again, w3.94
Fabrication:
  lines w10: 101.18,800 101.18,850 ; 121.18,810 101.18,825 ; 121.18,840 101.18,825 ; 231.18,810 251.18,825 ; 231.18,840 251.18,825 ; 251.18,800 251.18,850 ; 550,-50 550,0 ; 570,-40 550,-25 ; 570,-10 550,-25 ; 630,-40 650,-25 ; 630,-10 650,-25 ; 650,-50 650,0 ; 101.18,825 251.18,825 ; 550,-25 650,-25
  text "Mousebites in  / this region" at 51.18,853.86 h19.68
  text "Mousebites in  / this region" at 475,-130 h19.68
  text "White Solder Mask" at -2263.78,-1653.54 h59.06
  text "Black Silkscreen" at -2263.78,-1771.65 h59.06
  text "0.8mm Thickness" at -2263.78,-1889.76 h59.06
Frame:
  drawing of 15 lines, arcs and shapes, not listed
  text "Document" at 8618.19,-2610.67 h78.74
  text ".PCB_TITLE" at 8677.24,-2827.21 h118.11
  text "Layer Name" at 8618.19,-3004.37 h78.74
  text "<PANEL>" at 8677.24,-3220.91 h118.11
  text "Date" at 8618.19,-3398.07 h78.74
  text "Rev" at 10192.99,-3398.07 h78.74
  text ".Print_Date" at 8736.3,-3614.61 h137.8
  text ".PCB_REV" at 10370.15,-3614.61 h157.48
  text "Desginer" at 6649.68,-3791.77 h78.74
  text "Document" at 8618.19,-3791.77 h78.74
  text ".Pcb_File_Name_No_Path" at 8677.24,-3988.62 h59.06
  text ".PCB_ENGINEER" at 6826.85,-4008.31 h157.48
aisler-bridges:
  lines w2.2: 175,800 175,898.43 ; 600,-98.43 600,0

## Dimensions
700,750 to 0,700 on Fabrication
50,800 to 50,0 on Fabrication

## Text inside footprints (layer, text, board x,y; h text height)
J1: Comments "PCB Edge" at 259.45,-38.98 h24